# Altium PCB f446.pcbdoc (part 1 of 2)
Units mil, origin at the board's own origin, x right, y up, seen from the top; angles counter-clockwise.
Board outline 2178.76 x 2196.35 mil, 2 copper layers (Top Layer, Bottom Layer); 68 components, 82 nets, 319 pads, 182 vias.
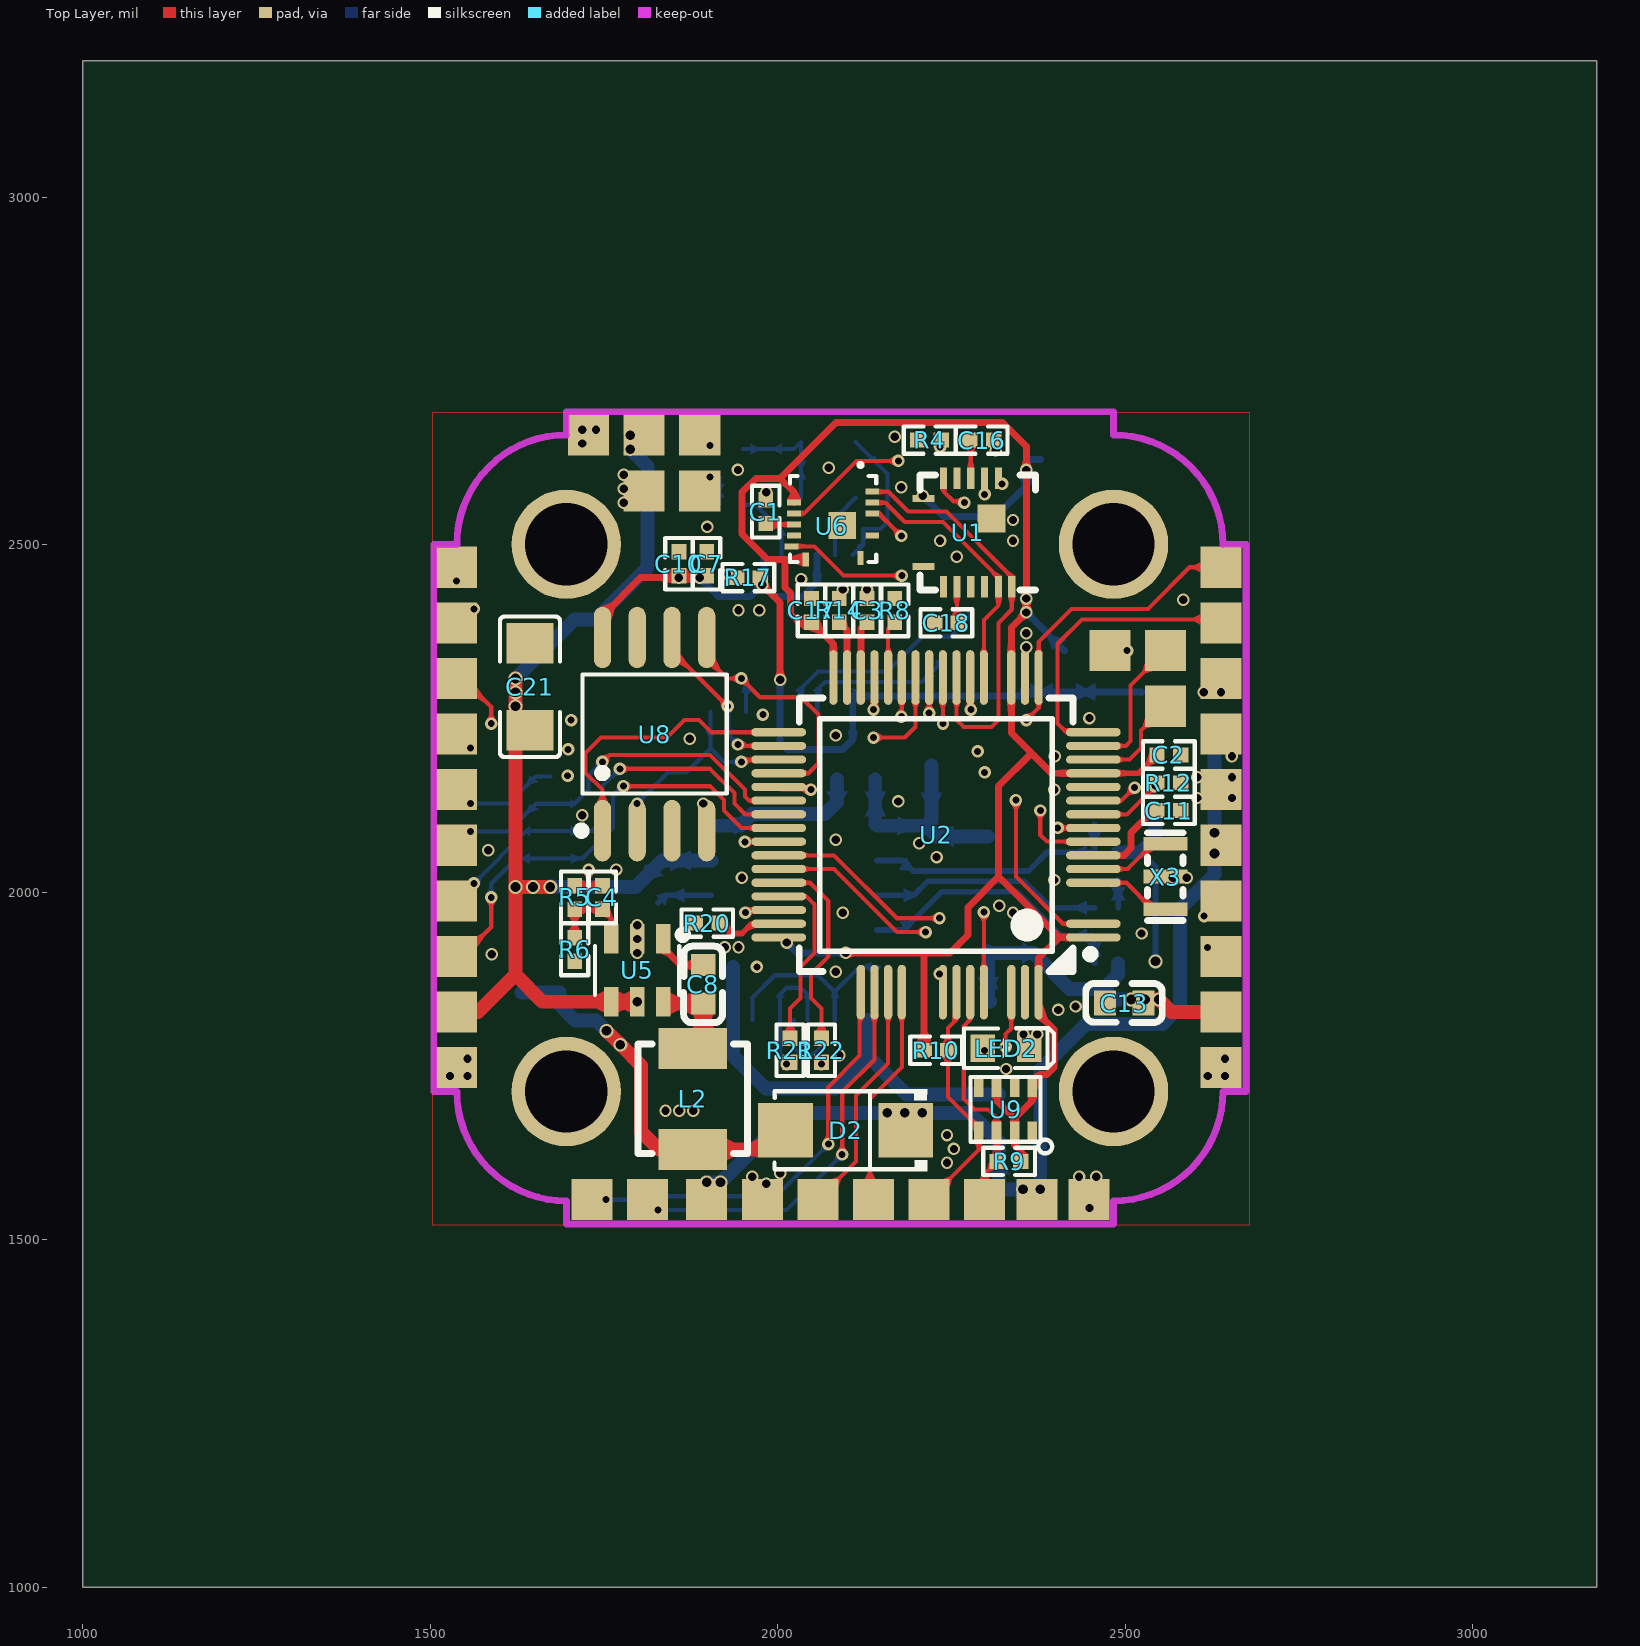
[diagram p0: Top Layer view]
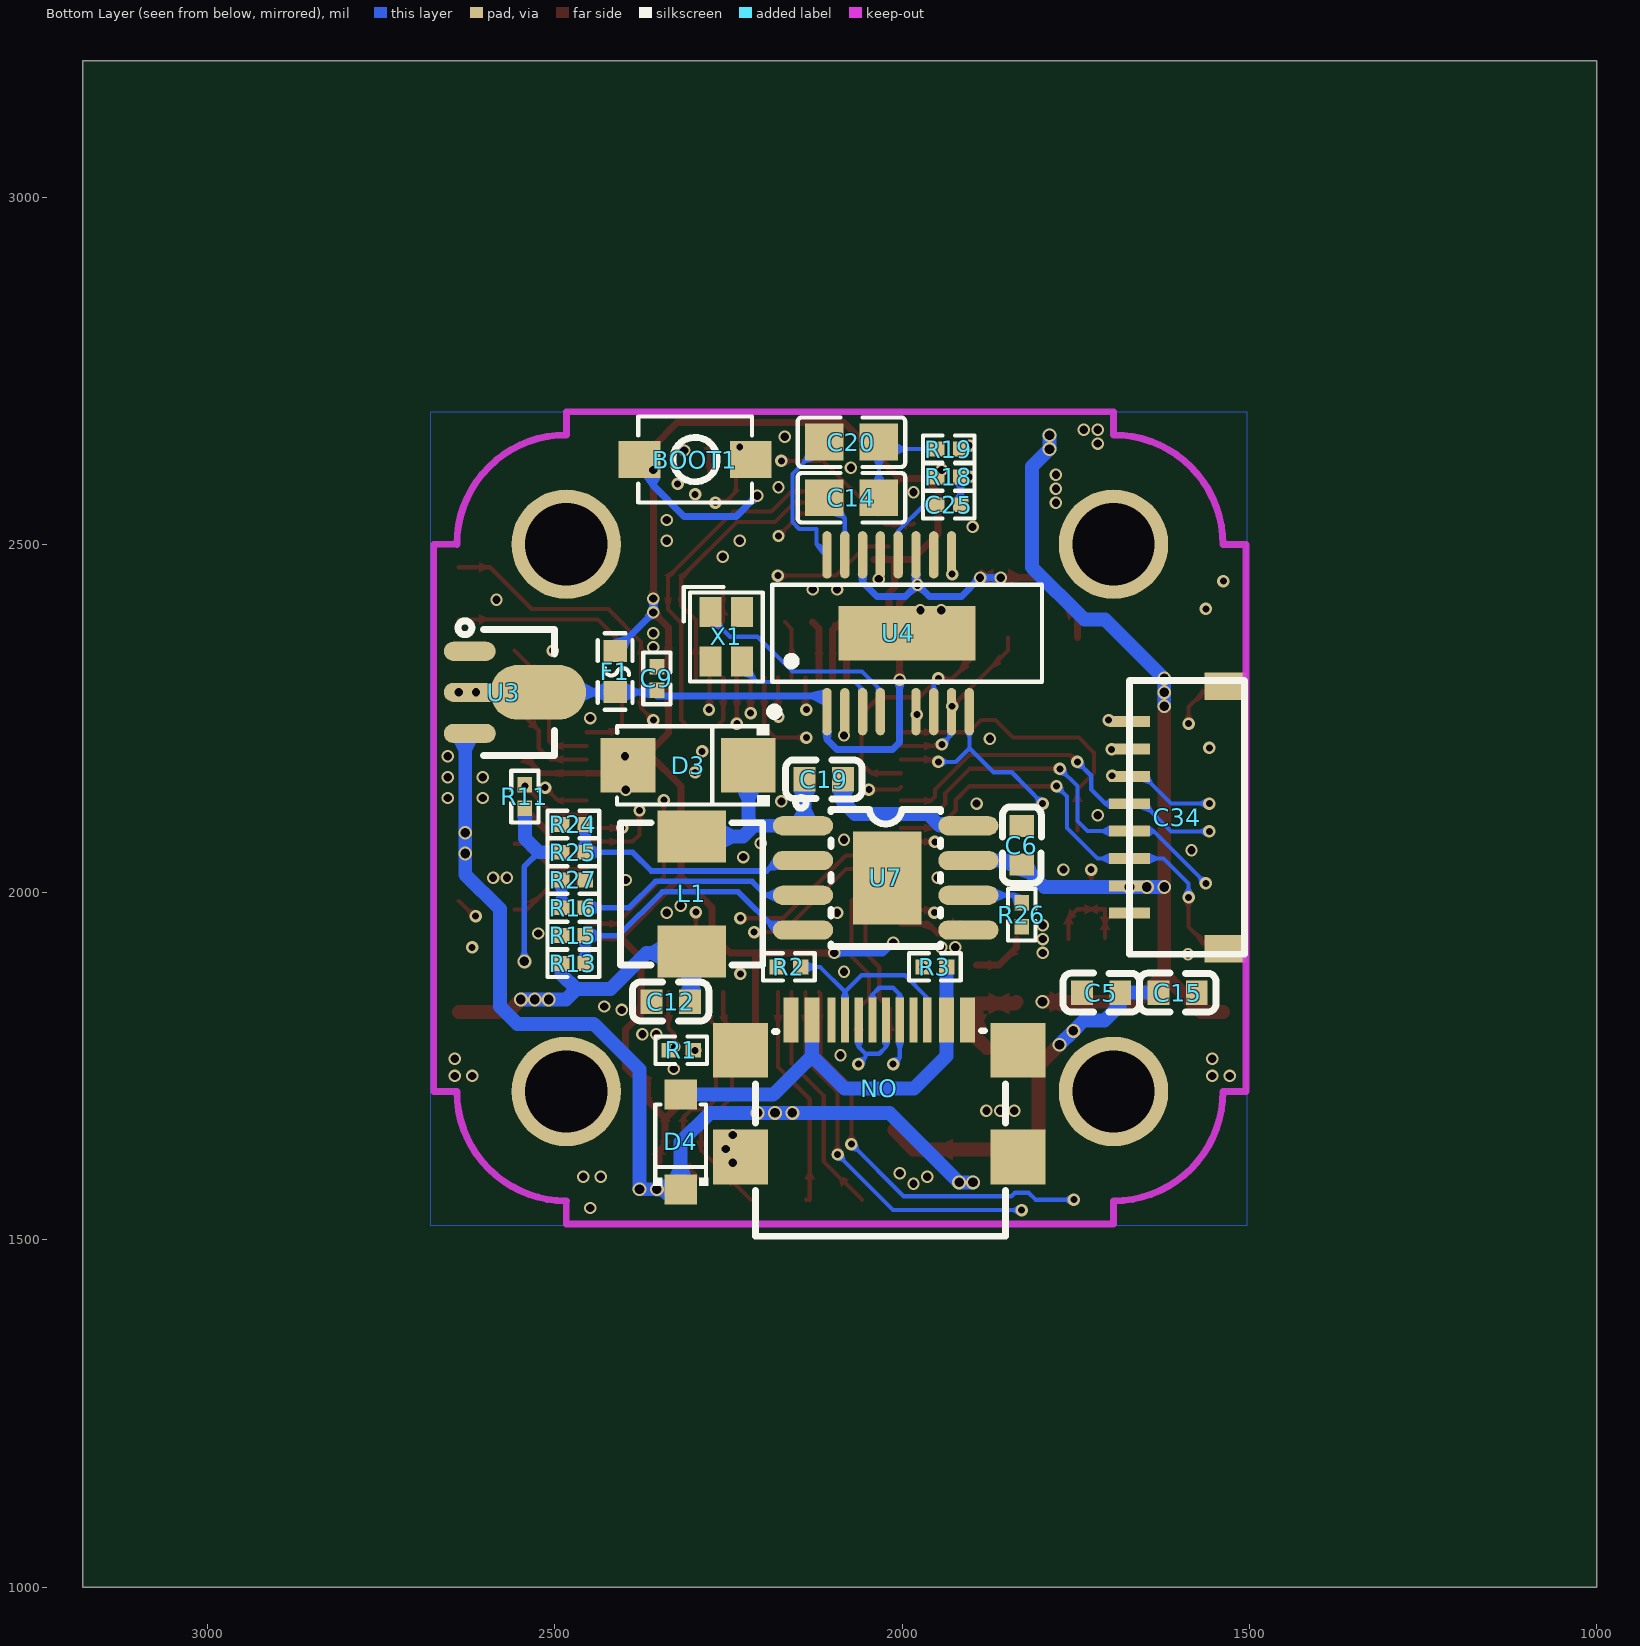
[diagram p1: Bottom Layer view, seen from below]

## Layer stack, top to bottom
Top Layer: signal copper (thickness not stored)
Dielectric: dielectric 12.6, FR-4, Dk 4.8
Bottom Layer: signal copper (thickness not stored)

## Board outline
3178.76,1000 1000,1000 1000,3196.35 3178.76,3196.35

## Components (designator, comment, footprint, x,y, rotation, side; value= is the part's Value field where it differs from the comment)
BOOT1 "两脚小龟 3*4*2" SW-SMD_L4.0-W2.9-LS5.0 2297.72,2622.6 r0 bottom
C1 "100nF" R0402#1 1982.72,2547.6 r270 top
C2 "100nF" R0402#1 2562.72,2197.6 r180 top
C3 "2.2uf" R0402#1 2128.48,2405.61 r90 top
C4 "100nf" R0402#1 1747.72,1992.6 r270 top
C5 "20uf" C0603#1 1713.48,1855.61 r180 bottom
C6 "20uf" C0603#1 1827.72,2067.6 r90 bottom
C7 "2.2uf" R0402#1 1897.72,2472.6 r270 top
C8 "100nf" C0603#2 1892.72,1867.6 r90 top
C9 "2.2uf" R0402#2 2352.72,2307.6 r270 bottom
C10 "2.2uf" R0402#1 1857.72,2472.6 r90 top
C11 "104" R0402#1 2562.72,2117.6 r0 top
C12 "20uf" C0603#1 2332.72,1842.6 r0 bottom
C13 "20uf" C0603#2 2498.48,1840.61 r0 top
C14 "47uF" C0805 2072.72,2567.6 r0 bottom
C15 "20uf" C0603#1 1603.48,1855.61 r180 bottom
C16 "100nF" R0402#1 2293.48,2650.61 r0 top
C17 "100nF" R0402#1 2048.48,2405.61 r270 top
C18 "2.2uf" R0402#1 2242.72,2387.6 r180 top
C19 "100nF" C0603#1 2112.72,2162.6 r180 bottom
C20 "47uF" C0805 2072.72,2647.6 r0 bottom
C21 "10uF" C1206 1643.48,2295.61 r270 top
C25 "100nF" R0402#2 1932.72,2557.6 r180 bottom
C34 "SH1.0-8P-AW" SH1.0-8P-AW 1672.72,2107.6 r270 bottom
D2 "SS34-A" SMA_L4.3-W2.6-LS5.2-RD#1 2097.72,1657.6 r180 top
D3 "SS34-A" SMA_L4.3-W2.6-LS5.2-RD#2 2307.72,2182.6 r180 bottom
D4 "1N4148W_C2688235" SOD-123_L2.7-W1.6-LS3.8-RD 2318.48,1640.61 r270 bottom
F1 "0603-035" F0603 2412.72,2317.6 r270 bottom
L1 "10uH" IND-SMD_L5.2-W5.2_MCW-0530 2302.72,1997.6 r90 bottom
L2 "4.7uH" IND-SMD_L4.3-W4.0_GPSR0420 1877.72,1702.6 r270 top
LED2 "LED-0603_R" LED0603_RED 2328.48,1775.61 r0 top
NO "TYPEC 16PIN四脚全贴单排" USB-C-SMD_TYPEC-16PIN 2032.72,1717.6 r0 bottom
R1 "1k" R0402#2 2317.72,1772.6 r0 bottom
R2 "5.1K" R0402#2 2162.72,1892.6 r0 bottom
R3 "10K" R0402#2 1952.72,1892.6 r0 bottom
R4 "10K" R0402#1 2218.48,2650.61 r0 top
R5 "52.5KΩ" R0402#1 1707.72,1992.6 r90 top
R6 "10K" R0402#1 1707.72,1917.6 r90 top
R8 "10K" R0402#1 2168.48,2405.61 r270 top
R9 "4.7K" R0402#1 2332.72,1612.6 r0 top
R10 "4.7K" R0402#1 2227.72,1772.6 r180 top
R11 "10K" R0402#2 2542.72,2137.6 r90 bottom
R12 "1k" R0402#1 2562.72,2157.6 r180 top
R13 "47K" R0402#2 2472.72,1897.6 r180 bottom
R14 "0Ω" R0402#1 2088.48,2405.61 r270 top
R15 "4.7K" R0402#2 2472.72,1937.6 r0 bottom
R16 "150pF" R0402#2 2472.72,1977.6 r0 bottom
R17 "1K" R0402#1 1957.72,2452.6 r0 top
R18 "75R" R0402#2 1932.72,2597.6 r180 bottom
R19 "75R" R0402#2 1932.72,2637.6 r0 bottom
R20 "0Ω" R0402#1 1898.48,1955.61 r180 top
R21 "22R" R0402#1 2017.72,1772.6 r90 top
R22 "22R" R0402#1 2062.72,1772.6 r90 top
R24 "24K" R0402#2 2472.72,2097.6 r0 bottom
R25 "100K" R0402#2 2472.72,2057.6 r180 bottom
R26 "100K" R0402#2 1827.72,1967.6 r270 bottom
R27 "100K" R0402#2 2472.72,2017.6 r180 bottom
U1 "MPU6000" MPU6000 2287.72,2517.6 r90 top
U2 "STM32F446RCT6" STM32F446 2227.72,2082.6 r90 top
U3 "AMS1117S-3.3" SOT-89-3_L4.5-W2.5-P1.50-LS4.1-BR 2572.72,2287.6 r180 bottom
U4 "AT7456E" HTSSOP-28_L9.7-W4.4-P0.65-LS6.4-BL-EP-2 1992.72,2372.6 r0 bottom
U5 "TPMP2359DJ" SOT-23-6_L2.9-W1.6-P0.95-LS2.8-BL 1797.72,1887.6 r180 top
U6 "MPU6500" MPU6500 2077.72,2527.6 r0 top
U7 "MP1584DR" SOIC-8_L4.9-W3.9-P1.27-LS6.0-BL-EP3.4 2023.48,2020.61 r90 bottom
U8 "W25Q128FVSIG" SOIC-8_L5.3-W5.3-P1.27-LS8.0-BL 1822.72,2227.6 r0 top
U9 "BMP280" LGA-8 2327.72,1687.6 r270 top
X1 "27MHz" CRYSTAL-SMD_4P-L2.0-W1.6-BL 2252.72,2367.6 r90 bottom
X3 "8MHz" X3213 2557.72,2022.6 r270 top

## Footprints (in the part's own frame and the unit in brackets; to place one, negate y for a bottom-side part, rotate by r counter-clockwise, add the part's x,y. Pads: shape width x height; smd on the part's side, far side on the other; paste and mask are expansions set on the pad)
C0603#1 [mm]
  rect 0.8x0.9 smd: 1(0.7,0) 2(-0.7,0)
  silkscreen extent -1.39,-0.72 1.41,0.71
C0603#2 [mm]
  rect 0.8x0.9 smd: 1(-0.7,0) 2(0.7,0)
  silkscreen extent -1.41,-0.71 1.39,0.72
C0805 [mm]
  rect 1.41x1.35 smd: 1(1,0) 2(-1,0)
  silkscreen extent -1.96,-0.9 1.96,0.9
C1206 [mm]
  rect 1.485x1.728 smd: 1(-1.593,0) 2(1.593,0)
  silkscreen extent -2.56,-1.09 2.56,1.09
CRYSTAL-SMD_4P-L2.0-W1.6-BL [mm]
  rect 1.1x0.8 smd: 1(0.9,0.575) 2(-0.9,0.575) 3(-0.9,-0.575) 4(0.9,-0.575)
  silkscreen extent -1.64,-1.33 1.82,1.56
F0603 [mil]
  rect 31.75x34.02 smd: 1(29.65,0) 2(-29.66,0)
  silkscreen extent -55,-25 55,25
HTSSOP-28_L9.7-W4.4-P0.65-LS6.4-BL-EP-2 [mm]
  oval 0.343x1.731 smd: 4(2.275,2.866) 5(1.625,2.866) 6(0.975,2.866) 8(-0.325,2.866) 9(-0.975,2.866) 10(-1.625,2.866) 11(-2.275,2.866) 19(-1.625,-2.866) 20(-0.975,-2.866) 21(-0.325,-2.866) 22(0.325,-2.866) 23(0.975,-2.866) 24(1.625,-2.866) 25(2.275,-2.866) 26(2.925,-2.866) A1(2.925,2.866)
  rect 5x2 smd: 29(0,0)
  silkscreen extent -4.93,-1.77 5,3.02
IND-SMD_L4.3-W4.0_GPSR0420 [mm]
  rect 1.5x2.5 smd: 1(-1.85,0) 2(1.85,0)
  silkscreen extent -2,-2 2,2
IND-SMD_L5.2-W5.2_MCW-0530 [mm]
  rect 1.9x2.5 smd: 1(2.1,0) 2(-2.1,0)
  silkscreen extent -2.6,-2.6 2.6,2.6
LED0603_RED [mm]
  rect 0.9x1 smd: 1(-0.85,0) 2(0.85,0)
  silkscreen extent -1.54,-0.73 1.75,0.73
LGA-8 [mil]
  rect 27.56x13.8 smd: 1(31.5,38.6) 2(31.5,13) 3(31.5,-13) 4(31.5,-38.6) 5(-31.5,-38.6) 6(-31.5,-13) 7(-31.5,13) 8(-31.5,38.6)
  silkscreen extent -46,-50 63,67
MPU6000 [mil]
  rect 31.1x10.2 smd: 8(78,-30) 9(78,-10) 10(78,10) 11(78,30) 12(78,49) 19(-78,49) 20(-78,30) 21(-78,10) 22(-78,-10) 23(-78,-30) 24(-78,-49)
  rect 10.2x31.1 smd: 13(49,78) 18(-49,78)
  rect 40x40 smd: 25(20,-20)
  silkscreen extent -83,-83 83,83
MPU6500 [mm]
  rect 0.505x0.224 smd: 8(-1.378,0.839) 9(-1.378,0.439) 10(-1.378,0.039) 11(-1.378,-0.361) 12(-1.477,-0.761) 20(1.477,-0.361) 22(1.477,0.439) 23(1.477,0.839) 24(1.477,1.239)
  rect 0.224x0.505 smd: 13(-0.95,-1.239) 18(1.05,-1.189)
  rect 1x1 smd: 25(0.381,0)
  silkscreen extent -1.53,-1.34 1.63,2.29
R0402#1 [mm]
  rect 0.566x0.54 smd: 1(-0.433,0) 2(0.433,0)
  silkscreen extent -0.94,-0.5 0.94,0.5
R0402#2 [mm]
  rect 0.566x0.54 smd: 1(0.433,0) 2(-0.433,0)
  silkscreen extent -0.94,-0.5 0.94,0.5
SH1.0-8P-AW [mm]
  rect 1x1.5 smd: 0(-4.8,3.5) 0(4.8,3.5)
  rect 0.4x1.5 smd: 1(3.5,0) 2(2.5,0) 3(1.5,0) 4(0.5,0) 5(-0.5,0) 6(-1.5,0) 7(-2.5,0) 8(-3.5,0)
  silkscreen extent -5,0 5,4.2
SMA_L4.3-W2.6-LS5.2-RD#1 [mm]
  rect 2x2 smd: 1(-2.2,0) 2(2.2,0)
  silkscreen extent -2.98,-1.5 2.6,1.5
SMA_L4.3-W2.6-LS5.2-RD#2 [mm]
  rect 2x2 smd: 1(2.2,0) 2(-2.2,0)
  silkscreen extent -2.6,-1.5 2.98,1.5
SOD-123_L2.7-W1.6-LS3.8-RD [mm]
  rect 1.1x1.2 smd: 1(1.735,0) 2(-1.735,0)
  silkscreen extent -1.38,-1 1.6,1
SOIC-8_L4.9-W3.9-P1.27-LS6.0-BL-EP3.4 [mm]
  oval 0.7x2.2 smd: 1(1.905,3.023) 2(0.635,3.023) 3(-0.635,3.023) 4(-1.905,3.023) 5(-1.905,-3.023) 6(-0.635,-3.023) 7(0.635,-3.023) 8(1.905,-3.023)
  rect 3.4x2.5 smd: 9(0,-0.051)
  silkscreen extent -2.5,-2 2.93,3.29
SOIC-8_L5.3-W5.3-P1.27-LS8.0-BL [mm]
  oval 0.63x2.25 smd: 1(-1.905,-3.53) 2(-0.635,-3.53) 3(0.635,-3.53) 4(1.905,-3.53) 5(1.905,3.53) 6(0.635,3.53) 7(-0.635,3.53) 8(-1.905,3.53)
  silkscreen extent -2.82,-3.68 2.64,2.18
SOT-23-6_L2.9-W1.6-P0.95-LS2.8-BL [mm]
  rect 0.532x1.072 smd: 1(-0.95,-1.149) 2(0,-1.149) 3(0.95,-1.149) 4(0.95,1.149) 5(0,1.149) 6(-0.95,1.149)
  silkscreen extent -1.82,-1.45 1.54,0.89
SOT-89-3_L4.5-W2.5-P1.50-LS4.1-BR [mm]
  oval 1.9x0.7 smd: 1(-1.25,1.501) 3(-1.25,-1.501)
  oval 2.1x0.7 smd: 2(-1.151,0)
  oval 3.5x2 smd: 2(1.25,0)
  silkscreen extent -1.68,-2.3 1.85,2.61
STM32F446 [mm]
  oval 0.3x2 smd: 1(-3.75,-5.75) 2(-3.25,-5.75) 5(-1.75,-5.75) 6(-1.25,-5.75) 7(-0.75,-5.75) 8(-0.25,-5.75) 9(0.25,-5.75) 10(0.75,-5.75) 11(1.25,-5.75) 12(1.75,-5.75) 13(2.25,-5.75) 14(2.75,-5.75) 15(3.25,-5.75) 16(3.75,-5.75) 33(3.75,5.75) 34(3.25,5.75) 35(2.75,5.75) 36(2.25,5.75) 37(1.75,5.75) 38(1.25,5.75) 39(0.75,5.75) 40(0.25,5.75) 41(-0.25,5.75) 42(-0.75,5.75) 43(-1.25,5.75) 44(-1.75,5.75) 45(-2.25,5.75) 46(-2.75,5.75) 47(-3.25,5.75) 48(-3.75,5.75)
  oval 2x0.3 smd: 17(5.75,-3.75) 18(5.75,-3.25) 19(5.75,-2.75) 21(5.75,-1.75) 22(5.75,-1.25) 23(5.75,-0.75) 24(5.75,-0.25) 25(5.75,0.25) 26(5.75,0.75) 27(5.75,1.25) 28(5.75,1.75) 29(5.75,2.25) 30(5.75,2.75) 31(5.75,3.25) 32(5.75,3.75) 51(-5.75,2.75) 52(-5.75,2.25) 53(-5.75,1.75) 54(-5.75,1.25) 57(-5.75,-0.25) 58(-5.75,-0.75) 59(-5.75,-1.25) 60(-5.75,-1.75) 62(-5.75,-2.75) 63(-5.75,-3.25) 64(-5.75,-3.75)
  silkscreen extent -5,-5.79 5,5
SW-SMD_L4.0-W2.9-LS5.0 [mm]
  rect 1.53x1.36 smd: 1(2.035,0) 2(-2.035,0)
  silkscreen extent -2.08,-1.58 2.08,1.58
USB-C-SMD_TYPEC-16PIN [mm]
  rect 2x2 smd: 8(5.07,-1.4) 9(-5.07,-1.4) 10(5.07,2.5) 11(-5.07,2.5)
  rect 0.55x1.64 smd: A1B12(3.225,-2.5) A4B9(2.46,-2.5) B1A12(-3.225,-2.5) B4A9(-2.46,-2.5)
  rect 0.3x1.64 smd: A5(1.25,-2.5) A6(0.25,-2.5) A7(-0.25,-2.5) A8(-1.25,-2.5) B5(-1.75,-2.5) B6(-0.75,-2.5) B7(0.75,-2.5) B8(1.75,-2.5)
  silkscreen extent -4.61,-2.11 4.53,5.4
X3213 [mm]
  rect 0.5x1.6 smd: 1(-1.199,0) 2(0,0) 3(1.199,0)
  silkscreen extent -1.6,-0.65 1.6,0.65

## Free pads (board coordinates)
  rect 59.05x59.05 smd: 2(1897.72,1557.6) 2(2372.71,1557.6) 2(2447.72,1557.6) 2(2637.72,2067.6) 3(2137.72,1557.6) 3(2297.72,1557.6) 3(2637.72,2307.6) 3(2637.72,2387.6) 4(2057.72,1557.6) 4(2217.72,1557.6) 4(2477.72,2347.6) 4(2557.71,2267.6) 4(2557.71,2347.6) 4(2637.72,1827.6) 4(2637.72,1907.6) 4(2637.72,1987.6) 4(2637.72,2467.6) 5(1812.72,1557.59) 6(1732.72,1557.59) 7(1537.72,1827.6) 7(1807.72,2657.6) 8(1887.72,2577.6) 8(2637.72,2147.6) 9(1887.72,2657.6) 16(1537.71,1747.6) 16(1537.72,1907.6) 16(1727.72,2657.6) 16(1807.72,2577.6) 16(1977.71,1557.6) 16(2637.71,1747.6) 16(2637.71,2227.6) 17(1537.72,1987.6) 17(1537.72,2067.6) 17(1537.72,2147.6) 17(1537.72,2227.6) 17(1537.72,2307.6) 17(1537.72,2387.6) 17(1537.72,2467.6)
  round 157.48 hole 118.11: ""(1695.68,1713.27) ""(1695.68,2500.67) ""(2483.07,1713.27) ""(2483.08,2500.67)

## Via types
v1: diameter 17.91, hole 12.01, Top Layer to Bottom Layer, tented both sides, 93 vias
v2: diameter 17.91, hole 10.04, Top Layer to Bottom Layer, tented both sides, 64 vias
v3: diameter 20, hole 13.98, Top Layer to Bottom Layer, tented both sides, 24 vias
v4: diameter 17.91, hole 12, Top Layer to Bottom Layer, tented both sides, 1 vias

## Nets (pads, with @x,y where several pads share a name; then routed paths per layer and width w, separated by ;. In a path a pad name is that pad's centre, name@x,y a point inside that pad or via, vN(x,y) a via of type N, cw(c..) or ccw(c..) an arc to the next point about the centre after c; other vN are vias at no path point)
3V3_1: BOOT1.1 C2.2 C17.2 F1.2 R9.2 R10.2 U1.13 U2.1 U2.13 U2.19 U2.32 U2.48 U2.64 U6.8 U6.13 U9.2 U9.6 U9.8 | length 3208.5
  Top Layer w8.07: U2.13@2454.1,2171.18 2519.21,2171.19 C2.2@2545.68,2197.6
  Top Layer w10: 2010.71,2478.79 2010.71,2438.39 2018.51,2430.59 2018.51,2400.59 2030.51,2388.59 C17.2@2048.48,2388.57 2080.11,2356.99 U2.32@2080.08,2308.97 ; U6.8@2023.48,2560.61 2023.51,2575.59 2003.51,2595.59 ; U6.13@2040.31,2478.83 1985.21,2478.79 1948.51,2515.59 1948.51,2575.59 1968.51,2595.59 2003.51,2595.59 ; v1(2097.73,1912.6) 2247.71,1912.59 2273.51,1938.39 2273.51,1978.19 2317.71,2022.39 ; 2209.11,1912.59 2210.71,1910.99 R10.2@2210.68,1772.6 ; U9.6@2314.72,1719.1 2314.71,1700.59 2340.71,1674.59 ; R9.2@2349.76,1612.6 2349.81,1627.59 2340.71,1636.59 U9.2@2340.72,1656.1 2340.71,1674.59 ; v1(2357.73,2422.6) v1(2357.73,2402.6) 2336.01,2380.89 U2.19@2335.99,2308.97 2336.01,2229.29 2394.11,2171.19 U2.13@2454.1,2171.18 ; v1(2357.71,2607.59) 2357.71,2641.38 2323.48,2675.61 2083.53,2675.61 2003.51,2595.59 ; v1(2357.73,2422.6) v1(2357.71,2607.59) ; 2365.31,2199.99 2317.71,2152.59 2317.71,2022.39 ; U2.1@2454.1,1934.96 2405.11,1934.99 ; 2317.71,2022.39 2405.11,1934.99 ; 2340.71,1674.59 2366.31,1700.19 U9.8@2366.32,1719.1 2366.31,1726.19 2377.71,1737.59 2387.71,1737.59 2397.71,1747.59 2397.71,1802.59 2375.41,1824.99 U2.64@2375.36,1856.22 2375.41,1905.29 2405.11,1934.99
  Bottom Layer w10: v1(2012.73,1927.6) 2027.72,1912.6 v1(2097.73,1912.6) ; v1(2208.48,2570.61) 2238.51,2540.59 2313.51,2540.59 2358.51,2585.59 2358.51,2622.59 BOOT1.1@2377.84,2622.6 ; v1(2357.73,2422.6) v1(2357.73,2402.6) F1.2@2412.72,2347.25
3V3_2: C7.2 C9.1 C10.1 F1.1 pad.3@2637.72,2307.6 R17.2 U3.2 U4.21 U4.24 U4.A1 U8.8 | length 1349
  Top Layer w10: U8.8@1747.72,2366.57 1747.71,2397.59 1802.71,2452.59 v1(1857.73,2452.6) v1(1887.73,2452.6) ; v1(1977.73,2442.6) 2003.51,2416.89 v1(2003.48,2305.61)
  Bottom Layer w10: v1(1857.73,2452.6) v1(1887.73,2452.6) 1914.71,2425.59 1960.71,2425.59 v1(1977.73,2442.6) ; U4.21@1979.93,2485.43 1979.91,2444.79 v1(1977.73,2442.6) ; v1(2003.48,2305.61) 2003.51,2215.59 2013.51,2205.59 2093.51,2205.59 2107.91,2219.99 U4.A1@2107.88,2259.78 2107.91,2282.59 2352.71,2282.59 C9.1@2352.72,2290.56 2355.31,2287.99 2412.71,2287.99 2523.21,2287.99 U3.2@2523.52,2287.6 ; U4.24@2056.7,2485.43 2056.71,2446.59 2035.71,2425.59 1994.71,2425.59 v1(1977.73,2442.6)
  other v1: 2613.02,2287.6 2637.73,2287.6
+5V: D2.1 D4.1 pad.2@1897.72,1557.6 pad.2@2372.71,1557.6 pad.2@2637.72,2067.6 U3.3 | length 1438.1
  Bottom Layer w20: v3(1897.73,1582.6) v3(1917.73,1582.6) 2017.72,1682.6 v3(2157.73,1682.6) v3(2182.73,1682.6) v3(2207.73,1682.6) 2276.51,1682.59 2318.51,1640.59 D4.1@2318.47,1572.31 2352.41,1572.29 v3(2352.73,1572.6) v3(2377.73,1572.6) 2377.71,1744.89 2443.51,1810.59 2553.51,1810.59 2578.51,1835.59 2578.51,1975.59 2628.51,2025.59 2628.51,2228.49 U3.3@2621.92,2228.5
  other v3: 2628.48,2055.61 2628.48,2085.61
+9V: C12.2 C13.2 L1.2 pad.4@2637.72,1827.6 R13.2 | length 550.4
  Top Layer w20: v3(2508.48,1845.61) v3(2528.48,1845.61) v3(2548.48,1845.61) 2566.5,1827.59 pad.4@2637.72,1827.6
  Bottom Layer w20: C12.2@2305.17,1842.6 2302.71,1844.99 L1.2@2302.72,1914.92 2305.01,1912.59 2367.71,1912.59 2419.71,1860.59 2468.51,1860.59 ; R13.2@2489.76,1897.6 2489.81,1881.89 2468.51,1860.59 ; v3(2548.48,1845.61) v3(2528.48,1845.61) ; 2468.51,1860.59 2483.49,1845.61 v3(2508.48,1845.61) ; v3(2508.48,1845.61) v3(2528.48,1845.61) ; v3(2508.48,1845.61) v3(2528.48,1845.61)
ADC-RSSI1: pad.4@2477.72,2347.6 U2.11 | length 268.6
  Top Layer w5.98: U2.11@2454.1,2131.81 2494.71,2131.79 v2(2513.48,2150.61)
  Mid-Layer 1 w8.07: v2(2502.73,2347.6) 2513.48,2336.84 v2(2513.48,2150.61)
ADC_BAT: R11.1 R12.2 U2.10 | length 105.4
  Top Layer w5.98: U2.10@2454.1,2112.13 2502.21,2112.09 v2(2542.73,2152.6)
ADC_CURRENT: C34.7 U2.9 | length 829
  Top Layer w5.98: v2(2402.73,2092.6) 2402.91,2092.39 U2.9@2454.1,2092.44
  Mid-Layer 1 w8.07: v2(1698.48,2205.61) 1705.73,2205.61 1727.72,2227.6 1782.72,2227.6 1842.72,2167.6 1982.72,2167.6 1992.72,2177.6 2227.72,2177.6 2312.72,2092.6 v2(2402.73,2092.6)
C3_1: C3.1 U2.30 | length 83.3
  Top Layer w10: U2.30@2119.45,2308.97 2119.51,2379.59 C3.1@2128.48,2388.57
C4_1: C4.1 C5.1 C15.2 D2.2 L2.2 R5.2 | length 885
  Top Layer w5.98: R5.2@1707.72,2009.64 C4.1@1747.72,2009.64 ; 1727.61,2009.59 v2(1727.73,2032.6)
  Top Layer w20: v3(1753.48,1800.61) 1763.48,1790.61 v3(1773.48,1780.61) 1803.48,1750.61 1803.48,1655.61 1829.32,1629.77 L2.2@1877.72,1629.77 ; L2.2@1877.72,1629.77 1983.31,1629.79 D2.2@2011.11,1657.6
  Mid-Layer 1 w8.07: v2(1727.73,2032.6) 1727.73,1826.36 v3(1753.48,1800.61)
  Bottom Layer w20: C15.2@1631.03,1855.61 C5.1@1685.92,1855.61 1685.92,1838.16 1708.48,1815.61 1738.48,1815.61 v3(1753.48,1800.61) v3(1773.48,1780.61)
C4_2: C4.2 R5.1 R6.2 U5.3 | length 128.9
  Top Layer w5.98: R6.2@1707.72,1934.64 R5.1@1707.72,1975.56 C4.2@1747.72,1975.56 1760.31,1962.99 U5.3@1760.31,1932.89
C8_1: C8.1 L2.1 U5.6 | length 129.3
  Top Layer w20: U5.6@1835.12,1842.36 1837.41,1839.99 C8.1@1892.72,1840.04 1892.71,1790.49 L2.1@1877.71,1775.49
C8_2: C8.2 U5.1 | length 80.6
  Top Layer w10: U5.1@1835.11,1932.89 1835.11,1920.19 1860.21,1895.19 C8.2@1892.72,1895.15
C11_1: C11.1 U2.7 | length 131.3
  Top Layer w10: U2.7@2454.1,2053.07 2498.21,2053.09 2508.51,2063.39 2508.51,2085.59 2540.51,2117.59 C11.1@2545.68,2117.6
C16_1: C16.1 U1.10 | length 56.3
  Top Layer w5.98: C16.1@2276.44,2650.61 2277.71,2650.59 U1.10@2277.72,2595.6
C18_1: C18.1 U1.20 | length 52.9
  Top Layer w5.98: U1.20@2257.72,2439.6 2257.71,2389.59 C18.1@2259.76,2387.6
C19_1: C19.1 U7.8 | length 227.5
  Bottom Layer w20: U7.8@1904.48,2095.61 1945.71,2095.59 1962.71,2112.59 2067.71,2112.59 2085.21,2130.09 C19.1@2085.17,2162.6
C19_2: C19.2 D3.1 L1.1 U7.1 | length 324.6
  Bottom Layer w20: C19.2@2140.28,2162.6 2140.31,2097.79 U7.1@2142.48,2095.61 2213.51,2095.59 ; D3.1@2221.11,2182.6 2221.11,2103.19 2213.51,2095.59 ; L1.1@2302.72,2080.28 2228.81,2080.29 2213.51,2095.59
C25_2: C25.2 U4.22 | length 105.8
  Bottom Layer w5.98: C25.2@1949.76,2557.6 1967.71,2557.59 2005.51,2519.79 U4.22@2005.52,2485.43
D4_2: D4.2 NO.A4B9 NO.B4A9 R3.2 | length 624.1
  Bottom Layer w20: R3.2@1935.68,1892.6 NO.B4A9@1935.87,1816.03 1935.91,1764.49 1982.71,1717.59 2082.71,1717.59 2129.61,1764.49 ; NO.A4B9@2129.57,1816.03 2129.61,1764.49 ; D4.2@2318.47,1708.91 2185.21,1708.89 2129.61,1764.49
FLASH_CS: U2.33 U8.1 | length 426.6
  Top Layer w5.98: U8.1@1747.72,2088.62 1747.71,2147.59 1723.51,2171.79 1723.51,2200.59 1745.41,2222.59 1840.51,2222.59 1865.51,2247.59 1886.51,2247.59 1903.81,2230.29 U2.33@2001.41,2230.29
GND: C1.1 C2.1 C3.2 C5.2 C6.1 C7.1 C9.2 C10.2 C11.2 C12.1 C13.1 C15.1 C16.2 C17.1 C18.2 C21.1 C34.0 C34.1 D3.2 LED2.2 NO.8 NO.9 NO.10 NO.11 NO.A1B12 NO.B1A12 pad.2@2447.72,1557.6 pad.8@2637.72,2147.6 pad.16@1537.71,1747.6 pad.16@1727.72,2657.6 pad.16@1807.72,2577.6 pad.16@1977.71,1557.6 pad.16@2637.71,1747.6 pad.16@2637.71,2227.6 R2.1 R4.1 R6.1 R8.1 R12.1 R14.1 R15.1 R18.2 R20.2 R24.1 R26.1 R27.1 U1.11 U1.18 U1.19 U1.21 U1.22 U1.25 U2.12 U2.18 U2.63 U3.1 U4.4 U4.20 U4.23 U4.29 U5.2 U6.11 U6.18 U6.20 U6.25 U7.5 U7.9 U8.4 U9.1 U9.5 U9.7 X1.2 X1.4 X3.2
  other v1: 2448.48,1545.61 1983.48,1580.61 1963.48,1590.61 2433.48,1590.61 2458.48,1590.61 2003.48,1595.61 2243.48,1610.61 2253.48,1630.61 2243.48,1650.61 1838.48,1685.61 1858.48,1685.61 1878.48,1685.61 1528.48,1735.61 1553.48,1735.61 2618.48,1735.61 2643.48,1735.61 2328.48,1745.61 1553.48,1760.61 2643.48,1760.61 2088.48,1765.61 2353.48,1795.61 2373.48,1795.61 2403.48,1830.61 2428.48,1835.61 2083.48,1885.61 1588.48,1910.61 1797.73,1912.6 1923.48,1920.61 1943.48,1920.61 1797.73,1932.6 2523.48,1940.61 1797.73,1952.6 2093.48,1970.61 2338.48,1970.61 2318.48,1980.61 2397.73,2017.6 1948.48,2020.61 2568.48,2020.61 2588.48,2020.61 1767.73,2032.6 2228.48,2050.61 2203.48,2070.61 2083.48,2075.61 1718.48,2110.61 1892.73,2127.6 2173.48,2130.61 2603.48,2135.61 2653.48,2135.61 2397.73,2147.6 2603.48,2165.61 2653.48,2165.61 2398.48,2195.61 2653.48,2195.61 1873.48,2220.61 2083.48,2225.61 2448.48,2250.61 2357.73,2352.6 2357.73,2372.6 1943.48,2405.61 1973.48,2405.61 2583.48,2420.61 2093.48,2435.61 2128.48,2435.61 2033.48,2450.61 2257.73,2482.6 2233.48,2505.61 2338.48,2505.61 1898.48,2525.61 2338.48,2535.61 1778.48,2560.61 1983.48,2575.61 1778.48,2580.61 2177.73,2582.6 1778.48,2600.61 1942.73,2607.6 2073.48,2610.61 2313.48,2635.61 1718.48,2645.61 2168.48,2655.61 1718.48,2665.61 1738.48,2665.61
  other v4: 1583.48,2060.61
GYRO-CS1: U1.8 U2.8 | length 645.5
  Top Layer w5.98: v2(2377.73,2117.6) 2377.71,2082.59 2387.61,2072.79 U2.8@2454.1,2072.76
  Mid-Layer 1 w8.07: v2(2322.73,2587.6) 2357.71,2552.59 2357.71,2487.59 2422.71,2422.59 2422.71,2247.59 2377.71,2202.59 v2(2377.73,2117.6)
GYRO-CS2: U2.25 U6.22 | length 450.2
  Top Layer w5.98: U6.22@2135.88,2544.86 2145.51,2544.89 v2(2177.73,2512.6) ; v2(2217.73,2257.6) 2217.91,2257.79 U2.25@2217.88,2308.97
  Mid-Layer 1 w8.07: v2(2177.73,2512.6) 2167.71,2522.59 2142.71,2522.59 2132.71,2512.59 2132.71,2466.39 2217.71,2381.39 v2(2217.73,2257.6)
GYRO_EXTL1: U1.12 U2.2 | length 813.4
  Top Layer w5.98: U1.12@2238.72,2595.6 2238.71,2576.59 2252.71,2562.59 2266.51,2562.59 v2(2268.48,2560.61) ; v2(2342.73,2132.6) 2342.71,2022.59 2410.71,1954.69 U2.2@2454.11,1954.69
  Mid-Layer 1 w8.07: v2(2268.48,2560.61) 2297.72,2531.36 2297.72,2512.6 2402.72,2407.6 2402.72,2257.6 2342.73,2197.6 v2(2342.73,2132.6)
GYRO_EXTL2: U2.24 U6.12 | length 480.3
  Top Layer w5.98: U6.12@2019.56,2497.62 2052.71,2497.59 2094.71,2455.59 v2(2178.48,2455.61) ; U2.24@2237.56,2308.97 2237.71,2308.79 v2(2237.73,2242.6)
  Mid-Layer 1 w8.07: v2(2178.48,2455.61) 2237.73,2396.36 v2(2237.73,2242.6)
LED1: R1.1 U2.62 | length 82.1
  Top Layer w5.98: v2(2327.73,1777.6) 2327.71,1796.09 2336.01,1804.29 U2.62@2335.99,1856.22
LED2_1: LED2.1 R1.2
  other v2: 2297.73,1772.6
OSDCS: U2.29 U4.8 | length 213.4
  Top Layer w5.98: v2(2137.73,2262.6) 2139.11,2263.99 U2.29@2139.14,2308.97
  Mid-Layer 2 w8.07: v2(1978.48,2255.61) 1978.48,2252.6 2127.72,2252.6 v2(2137.73,2262.6)
OSDIN: C25.1 pad.8@1887.72,2577.6 R18.1 | length 40
  Bottom Layer w5.98: C25.1@1915.68,2557.6 R18.1@1915.68,2597.6
  other v2: 1902.73,2597.6
OSDOUT: pad.9 R19.2
  other v2: 1902.73,2642.6
R2_2: NO.A5 NO.B5 R2.2 | length 293.3
  Bottom Layer w5.98: NO.B5@1963.83,1816.03 1963.81,1848.69 1995.71,1880.59 2058.11,1880.59 2081.91,1856.79 ; NO.A5@2081.93,1816.03 2081.91,1856.79 ; R2.2@2145.68,1892.6 2117.71,1892.59 2081.91,1856.79
R4_2: BOOT1.2 R4.2 U2.60 | length 824.5
  Top Layer w5.98: U2.60@2296.62,1856.22 v2(2296.61,1971.23)
  Mid-Layer 1 w8.07: v2(2233.48,2640.61) 2233.48,2536.84 2312.72,2457.6 2312.72,2187.59 v2(2297.73,2172.6)
  Mid-Layer 2 w8.07: v2(2296.61,1971.23) 2296.61,2172.59 v2(2297.73,2172.6)
R17_1: R17.1 U4.19
  other v2: 1927.73,2457.6
R19_1: C14.2 C20.2 R19.1 | length 167.6
  Bottom Layer w5.98: R19.1@1949.76,2637.6 2023.31,2637.59 2033.31,2647.59 C14.2@2033.31,2567.59
R21_1: NO.A6 NO.B6 R21.1 | length 188.6
  Bottom Layer w5.98: v2(2012.73,1752.6) 2003.21,1762.09 NO.B6@2003.19,1816.03 2003.21,1853.09 2012.71,1862.59 2032.71,1862.59 2042.61,1852.79 NO.A6@2042.57,1816.03
R22_1: NO.A7 NO.B7 R22.1 | length 143.9
  Bottom Layer w5.98: NO.A7@2022.88,1816.03 2022.91,1777.49 2032.71,1767.59 2052.71,1767.59 ; NO.B7@2062.25,1816.03 2062.21,1777.09 2052.71,1767.59 ; v2(2062.73,1752.6) 2052.71,1762.61 2052.71,1767.59
R27_2: R16.1 R27.2 | length 40
  Bottom Layer w8.07: R16.1@2489.76,1977.6 R27.2@2489.76,2017.6
S1: C34.3 pad.16@1537.72,1907.6 U2.40 | length 635.8
  Top Layer w5.98: pad.16@1558.51,1920.59 1587.71,1949.89 v2(1587.73,1992.6) ; v2(1777.73,2152.6) 1902.71,2152.59 1922.71,2132.59 1922.71,2117.59 1947.91,2092.39 U2.40@2001.41,2092.39
  Bottom Layer w5.98: v2(1587.73,1992.6) 1587.71,2012.59 1623.71,2048.59 1672.71,2048.59 1718.71,2048.59 1762.71,2092.59 1762.71,2137.59 v2(1777.73,2152.6)
S2: C34.4 pad.17@1537.72,1987.6 U2.39 | length 572.3
  Top Layer w5.98: v2(1772.73,2177.6) 1902.71,2177.59 1937.71,2142.59 1937.71,2127.59 1953.21,2112.09 U2.39@2001.41,2112.09
  Bottom Layer w5.98: v2(1562.73,2012.6) 1638.01,2087.89 C34.4@1672.72,2087.91 1733.01,2087.89 1747.71,2102.59 1747.71,2152.59 v2(1772.73,2177.6)
S3: C34.5 pad.17@1537.72,2067.6 U2.38 | length 534.1
  Top Layer w5.98: v2(1747.73,2187.6) 1757.71,2197.59 1902.71,2197.59 1952.71,2147.59 1952.71,2137.59 1958.51,2131.79 U2.38@2001.41,2131.79
  Bottom Layer w5.98: v2(1557.73,2087.6) 1612.71,2087.59 1652.41,2127.29 C34.5@1672.72,2127.28 1707.41,2127.29 1727.71,2147.59 1727.71,2167.59 v2(1747.73,2187.6)
S4: C34.6 pad.17@1537.72,2147.6 U2.37 | length 570.6
  Top Layer w5.98: U2.37@2001.41,2151.49 2005.21,2147.59 v2(2047.73,2147.6)
  Mid-Layer 1 w8.07: v2(1697.73,2167.6) 1737.72,2207.6 1772.72,2207.6 1832.72,2147.6 v2(2047.73,2147.6)
  Bottom Layer w5.98: v2(1557.73,2127.6) 1612.71,2127.59 1651.81,2166.69 C34.6@1672.71,2166.69
S5: pad.17@1537.72,2227.6 U2.57 | length 809.6
  Mid-Layer 1 w8.07: v2(1557.73,2207.6) 1712.73,2052.6 2062.72,2052.6 v2(2232.73,1882.6)
S6: pad.17@1537.72,2307.6 U2.41 | length 566.9
  Top Layer w5.98: pad.17@1558.51,2295.59 1587.71,2266.39 v2(1587.73,2242.6) ; v2(1952.73,2072.6) 2001.21,2072.59 U2.41@2001.41,2072.79
  Mid-Layer 1 w8.07: v2(1587.73,2242.6) 1587.73,2212.59 1727.72,2072.6 v2(1952.73,2072.6)
S7: pad.17@1537.72,2387.6 U2.27 | length 744.2
  Top Layer w5.98: v2(2177.73,2252.6) 2177.71,2262.59 2178.51,2263.39 U2.27@2178.51,2308.97
  Mid-Layer 1 w8.07: v2(1562.73,2407.6) 1617.71,2352.59 2016.51,2352.59 2126.51,2242.59 2167.71,2242.59 v2(2177.73,2252.6)
S8: pad.17@1537.72,2467.6 U2.26 | length 860.3
  Top Layer w5.98: v2(2137.73,2222.6) 2182.71,2222.59 2198.21,2238.09 U2.26@2198.19,2308.97
  Mid-Layer 1 w8.07: v2(1537.73,2447.6) 1537.71,2397.59 1602.71,2332.59 2006.51,2332.59 2116.51,2222.59 v2(2137.73,2222.6)
S$205187: 
SCL: pad.4@2217.72,1557.6 R10.1 U2.58 U9.4 | length 351.7
  Top Layer w5.98: pad.4@2217.72,1557.6 2289.11,1628.99 U9.4@2289.12,1656.1 2289.11,1661.19 2244.81,1705.59 R10.1@2244.76,1772.6 2244.81,1804.69 2257.31,1817.09 U2.58@2257.25,1856.22
SDA: pad.3@2297.72,1557.6 R9.1 U2.59 U9.3 | length 341.5
  Top Layer w5.98: U2.59@2276.93,1856.22 2276.91,1816.79 2267.71,1807.59 2267.71,1702.59 2282.71,1687.59 2302.71,1687.59 2314.71,1675.59 U9.3@2314.72,1656.1 2315.71,1655.19 R9.1@2315.68,1612.6 2297.71,1594.59 pad.3@2297.72,1557.6
SPI_MISO1: U1.9 U2.22 U6.9 | length 699.3
  Top Layer w5.98: U6.9@2023.48,2544.86 2037.71,2544.89 2113.51,2620.59 v2(2173.48,2620.61) ; U2.22@2276.93,2308.97 2276.91,2263.39 v2(2277.73,2262.6)
  Mid-Layer 2 w8.07: v2(2173.48,2620.61) 2249.72,2620.61 v2(2297.73,2572.6) 2297.73,2267.6 2292.72,2262.6 v2(2277.73,2262.6)
SPI_MISO2: U2.35 U4.11 U8.2 | length 298.9
  Top Layer w5.98: v2(1947.73,2187.6) 1951.01,2190.89 U2.35@2001.41,2190.89
  Bottom Layer w5.98: v2(1797.73,2127.6) 1842.11,2172.59 1868.51,2172.59 1903.11,2207.19 ; U4.11@1903.11,2259.79 1903.11,2207.19 ; v2(1947.73,2187.6) 1922.71,2187.59 1903.11,2207.19
SPI_MOSI1: U1.24 U2.23 U6.24 | length 595.4
  Top Layer w5.98: U6.24@2135.88,2576.36 2159.01,2576.39 2187.71,2547.59 2242.71,2547.59 2336.71,2453.59 U1.24@2336.72,2439.6 2336.71,2406.59 2317.71,2387.59 2317.71,2247.59 2307.71,2237.59 2267.71,2237.59 2257.31,2248.09 U2.23@2257.25,2308.97
SPI_MOSI2: U2.36 U4.9 U8.5 | length 407.3
  Top Layer w5.98: U8.5@1897.72,2366.57 1897.71,2337.59 1927.71,2307.59 v2(1947.73,2307.6) 1974.71,2280.59 2033.51,2280.59 2058.51,2255.59 2058.51,2185.59 2044.01,2171.19 U2.36@2001.41,2171.19
  Bottom Layer w5.98: v2(1947.73,2307.6) 1954.31,2300.99 U4.9@1954.34,2259.78
SPI_SCK1: U1.23 U2.21 U6.23 | length 378.9
  Top Layer w5.98: U6.23@2135.88,2560.61 2154.71,2560.59 2182.71,2532.59 2237.71,2532.59 2317.71,2452.59 U1.23@2317.72,2439.6 2317.71,2412.59 2296.61,2391.49 U2.21@2296.62,2308.97
SPI_SCK2: U2.34 U4.10 U8.6 | length 244.7
  Top Layer w5.98: U8.6@1847.72,2366.57 1847.71,2347.59 1887.71,2307.59 v2(1927.73,2267.6) ; v2(1942.73,2212.6) 1944.71,2210.59 U2.34@2001.41,2210.59
  Bottom Layer w5.98: U4.10@1928.75,2259.78 1928.71,2226.59 v2(1942.73,2212.6)
U1_RXPPM: pad.4@2637.72,1907.6 U2.43 | length 663.8
  Top Layer w5.98: U2.43@2001.41,2033.39 2080.71,2033.39 2171.51,1942.59 v2(2212.73,1942.6)
  Mid-Layer 1 w8.07: v2(2212.73,1942.6) 2234.72,1920.61 v2(2618.48,1920.61)
U1_TX: pad.4@2637.72,1987.6 U2.42 | length 702.4
  Top Layer w5.98: U2.42@2001.41,2053.09 2081.01,2053.09 2171.51,1962.59 v2(2232.73,1962.6) ; v2(2613.48,1965.61) 2615.73,1965.61 pad.4@2637.72,1987.6
  Mid-Layer 1 w8.07: v2(2232.73,1962.6) 2254.71,1940.59 2488.41,1940.59 2513.41,1965.59 v2(2613.48,1965.61)
U2_28: R8.2 U2.28 | length 83.6
  Top Layer w5.98: U2.28@2158.82,2308.97 2158.81,2378.89 R8.2@2168.48,2388.57
U2_31: R14.2 U2.31 | length 84.3
  Top Layer w10: R14.2@2088.48,2388.57 2099.81,2377.29 U2.31@2099.77,2308.97
U2_47: R20.1 U2.47 | length 98
  Top Layer w8.07: R20.1@1915.52,1955.61 1918.51,1955.59 1933.51,1940.59 1948.51,1940.59 1962.51,1954.69 U2.47@2001.41,1954.69
U2_RX: C34.8 pad.4@2637.72,2467.6 U2.17 | length 1119.1
  Top Layer w5.98: v2(2357.73,2247.6) 2375.41,2265.29 U2.17@2375.36,2308.97 2375.41,2360.29 2422.71,2407.59 2532.71,2407.59 2592.71,2467.59 pad.4@2637.72,2467.6
  Mid-Layer 1 w8.07: v2(1702.73,2247.6) 1947.73,2247.59 1992.72,2202.6 v2(2287.73,2202.6)
  Mid-Layer 2 w8.07: v2(2287.73,2202.6) 2312.73,2202.6 v2(2357.73,2247.6)
U2_TX: pad.3@2637.72,2387.6 U2.16 | length 426
  Top Layer w5.98: U2.16@2454.11,2230.29 2415.11,2230.29 2402.71,2242.59 2402.71,2357.59 2437.71,2392.59 2637.71,2392.59 pad.3@2637.72,2387.6
U3_RX: pad.5 U2.52 | length 551
  Top Layer w5.98: v2(2092.73,1622.6) 2092.71,1712.59 2139.11,1758.99 U2.52@2139.14,1856.22
  Bottom Layer w5.98: v2(1827.73,1542.6) 2012.72,1542.6 v2(2092.73,1622.6)
U3_TX: pad.6 U2.51 | length 595.3
  Top Layer w5.98: v2(2072.73,1637.6) 2072.71,1719.89 2117.71,1764.89 2117.71,1854.49 U2.51@2119.45,1856.22
  Bottom Layer w5.98: v2(1752.73,1557.6) 1807.71,1557.59 1817.71,1567.59 1837.71,1567.59 1842.71,1562.59 1997.71,1562.59 v2(2072.73,1637.6)
U4_25: C14.1 U4.25 | length 94.5
  Bottom Layer w5.98: U4.25@2082.29,2485.43 2082.31,2537.79 C14.1@2112.09,2567.6
U4_26: C20.1 U4.26 | length 216.2
  Bottom Layer w5.98: U4.26@2107.88,2485.43 2123.11,2500.69 2123.11,2522.79 2147.91,2522.79 2157.71,2532.59 2157.71,2601.99 C20.1@2112.09,2647.6
U4_RX: pad.4@2557.71,2347.6 U2.15 | length 207.2
  Top Layer w5.98: U2.15@2454.11,2210.59 2500.71,2210.59 2507.71,2217.59 2507.71,2297.59 pad.4@2557.71,2347.6
U4_TX: pad.4@2557.71,2267.6 U2.14 | length 150
  Top Layer w5.98: U2.14@2454.1,2190.87 2506.01,2190.89 2522.71,2207.59 2522.71,2232.59 pad.4@2557.71,2267.6
U5_RX: pad.3@2137.72,1557.6 U2.54 | length 322.6
  Top Layer w5.98: pad.3@2137.72,1557.6 2132.71,1557.59 2132.71,1702.59 2178.51,1748.39 U2.54@2178.51,1856.22
U5_TX: pad.4@2057.72,1557.6 U2.53 | length 340.5
  Top Layer w5.98: pad.4@2057.72,1557.6 2112.71,1612.59 2112.71,1707.59 2158.81,1753.69 U2.53@2158.82,1856.22
U6_10: C1.2 U6.10 | length 41.4
  Top Layer w5.98: C1.2@1982.72,2530.56 1984.21,2529.09 U6.10@2023.48,2529.11
U7_2: R24.2 R25.1 U7.2 | length 370.6
  Bottom Layer w8.07: U7.2@2142.48,2045.61 2179.71,2045.59 2194.71,2030.59 2360.71,2030.59 2387.71,2057.59 R25.1@2455.68,2057.6 R24.2@2455.68,2097.6
U7_3: R16.2 U7.3 | length 337.2
  Bottom Layer w8.07: U7.3@2142.48,1995.61 2195.71,1995.59 2215.71,2015.59 2354.71,2015.59 2392.71,1977.59 R16.2@2455.68,1977.6
U7_4: R13.1 R15.2 U7.4 | length 402.1
  Bottom Layer w8.07: U7.4@2142.48,1945.61 2180.71,1945.59 2235.71,2000.59 2344.71,2000.59 2407.71,1937.59 R15.2@2455.68,1937.6 R13.1@2455.68,1897.6
U7_6: R26.2 U7.6 | length 81.4
  Bottom Layer w8.07: R26.2@1827.72,1984.64 1838.71,1995.59 U7.6@1904.48,1995.61
USB_DETECT: R3.1 U2.46 | length 134.2
  Top Layer w5.98: v2(1953.48,1970.61) 1957.21,1974.29 U2.46@2001.41,1974.29
  Mid-Layer 1 w8.07: v2(1953.48,1970.61) 1953.48,1936.84 1969.76,1920.56 v2(1969.77,1892.6)
USB_DM: R22.2 U2.44 | length 296.7
  Top Layer w5.98: U2.44@2001.41,2013.69 2046.61,2013.69 2072.71,1987.59 2072.71,1907.59 2047.71,1882.59 2047.71,1847.59 2062.71,1832.59 R22.2@2062.72,1789.64
USB_DP: R21.2 U2.45 | length 263.5
  Top Layer w5.98: U2.45@2001.41,1993.99 2041.31,1993.99 2052.71,1982.59 2052.71,1912.59 2032.71,1892.59 2032.71,1847.59 2017.71,1832.59 R21.2@2017.72,1789.64
VBAT+: C6.2 C21.2 C34.2 pad.7 R11.2 R25.2 U5.4 U5.5 U7.7 | length 2649.1
  Top Layer w20: pad.7@1537.72,1827.6 1568.92,1827.6 1622.71,1881.39 ; v3(1622.73,2267.6) v3(1622.73,2007.6) ; v3(1622.73,2267.6) 1622.73,2292.6 v3(1622.73,2287.6) ; v3(1672.73,2007.6) v3(1647.73,2007.6) v3(1622.73,2007.6) ; v3(1797.73,1842.36) U5.4@1760.32,1842.36 1661.71,1842.39 1622.71,1881.39 ; 1622.71,1881.39 v3(1622.73,2007.6) ; v3(1622.73,2287.6) v3(1622.73,2307.6) v3(1622.73,2287.6)
  Mid-Layer 1 w8.07: v3(1797.73,1842.36) 2385.21,1842.39 2443.61,1900.69 v3(2543.48,1900.61)
  Bottom Layer w8.07: 2522.72,2057.6 2543.48,2036.84 v3(2543.48,1900.61)
  Bottom Layer w20: v3(1622.73,2007.6) 1671.11,2007.59 C34.2@1672.72,2009.17 ; v3(1622.73,2267.6) 1622.73,2292.6 v3(1622.73,2287.6) v3(1622.73,2307.6) 1707.72,2392.59 1737.71,2392.59 1812.71,2467.59 1812.71,2612.59 v3(1787.73,2637.6) v3(1787.73,2657.6) ; v3(1672.73,2007.6) 1795.31,2007.59 C6.2@1827.72,2040.04 1833.31,2045.59 U7.7@1904.48,2045.61 ; R25.2@2489.76,2057.6 2522.71,2057.59 2542.71,2077.59 R11.2@2542.72,2120.56
X1_1: U4.6 X1.1 | length 326.4
  Bottom Layer w5.98: U4.6@2031.11,2259.78 2031.11,2290.99 2057.71,2317.59 2157.71,2317.59 2207.71,2367.59 2247.71,2367.59 2275.41,2395.29 X1.1@2275.36,2403.03
X1_3: U4.5 X1.3 | length 226.2
  Bottom Layer w5.98: U4.5@2056.7,2259.78 2056.71,2291.59 2067.71,2302.59 2207.71,2302.59 2230.11,2324.99 X1.3@2230.08,2332.17
X3_1: U2.6 X3.1 | length 118.7
  Top Layer w5.98: U2.6@2454.1,2033.39 2503.51,2033.39 2539.91,2069.79 X3.1@2557.72,2069.8
X3_3: U2.5 X3.3 | length 119.5
  Top Layer w5.98: U2.5@2454.1,2013.7 2501.61,2013.69 2539.91,1975.39 X3.3@2557.72,1975.4
pads on no net: NO.A8 NO.B8 U8.3 U8.7

## Polygon pours and split planes (outlines as drawn)
GND on Bottom Layer (solid): 1503.48,1520.61 1503.48,2690.61 2678.48,2690.61 2678.48,1520.61 1503.48,1520.61
GND on Mid-Layer 2 (solid): 1503.48,1520.61 1503.48,2690.61 2678.48,2690.61 2678.48,1520.61 1503.48,1520.61
GND on Mid-Layer 1 (solid): 1503.48,1520.61 1503.48,2690.61 2678.48,2690.61 2678.48,1520.61 1503.48,1520.61
GND on Top Layer (solid): 1503.48,1520.61 1503.48,2690.61 2678.48,2690.61 2678.48,1520.61 1503.48,1520.61

## Keep-outs
Keep-Out Layer:
  lines w10: 1538.2,1713.27 ccw(c1695.68,1713.27) 1695.68,1555.79 ; 1538.2,2500.67 cw(c1695.68,2500.67) 1695.68,2658.15 ; 2483.08,1555.79 ccw(c2483.08,1713.27) 2640.56,1713.27 ; 2483.08,2658.15 cw(c2483.08,2500.67) 2640.56,2500.67